# Altium PCB Face_Ant1V0.PcbDoc
Units mm, origin at the board's own origin, x right, y up, seen from the top; angles counter-clockwise.
Board outline 70 x 53 mm, 2 copper layers (Top Layer, Bottom Layer); 1 components, 1 nets, 4 pads, 2 vias.
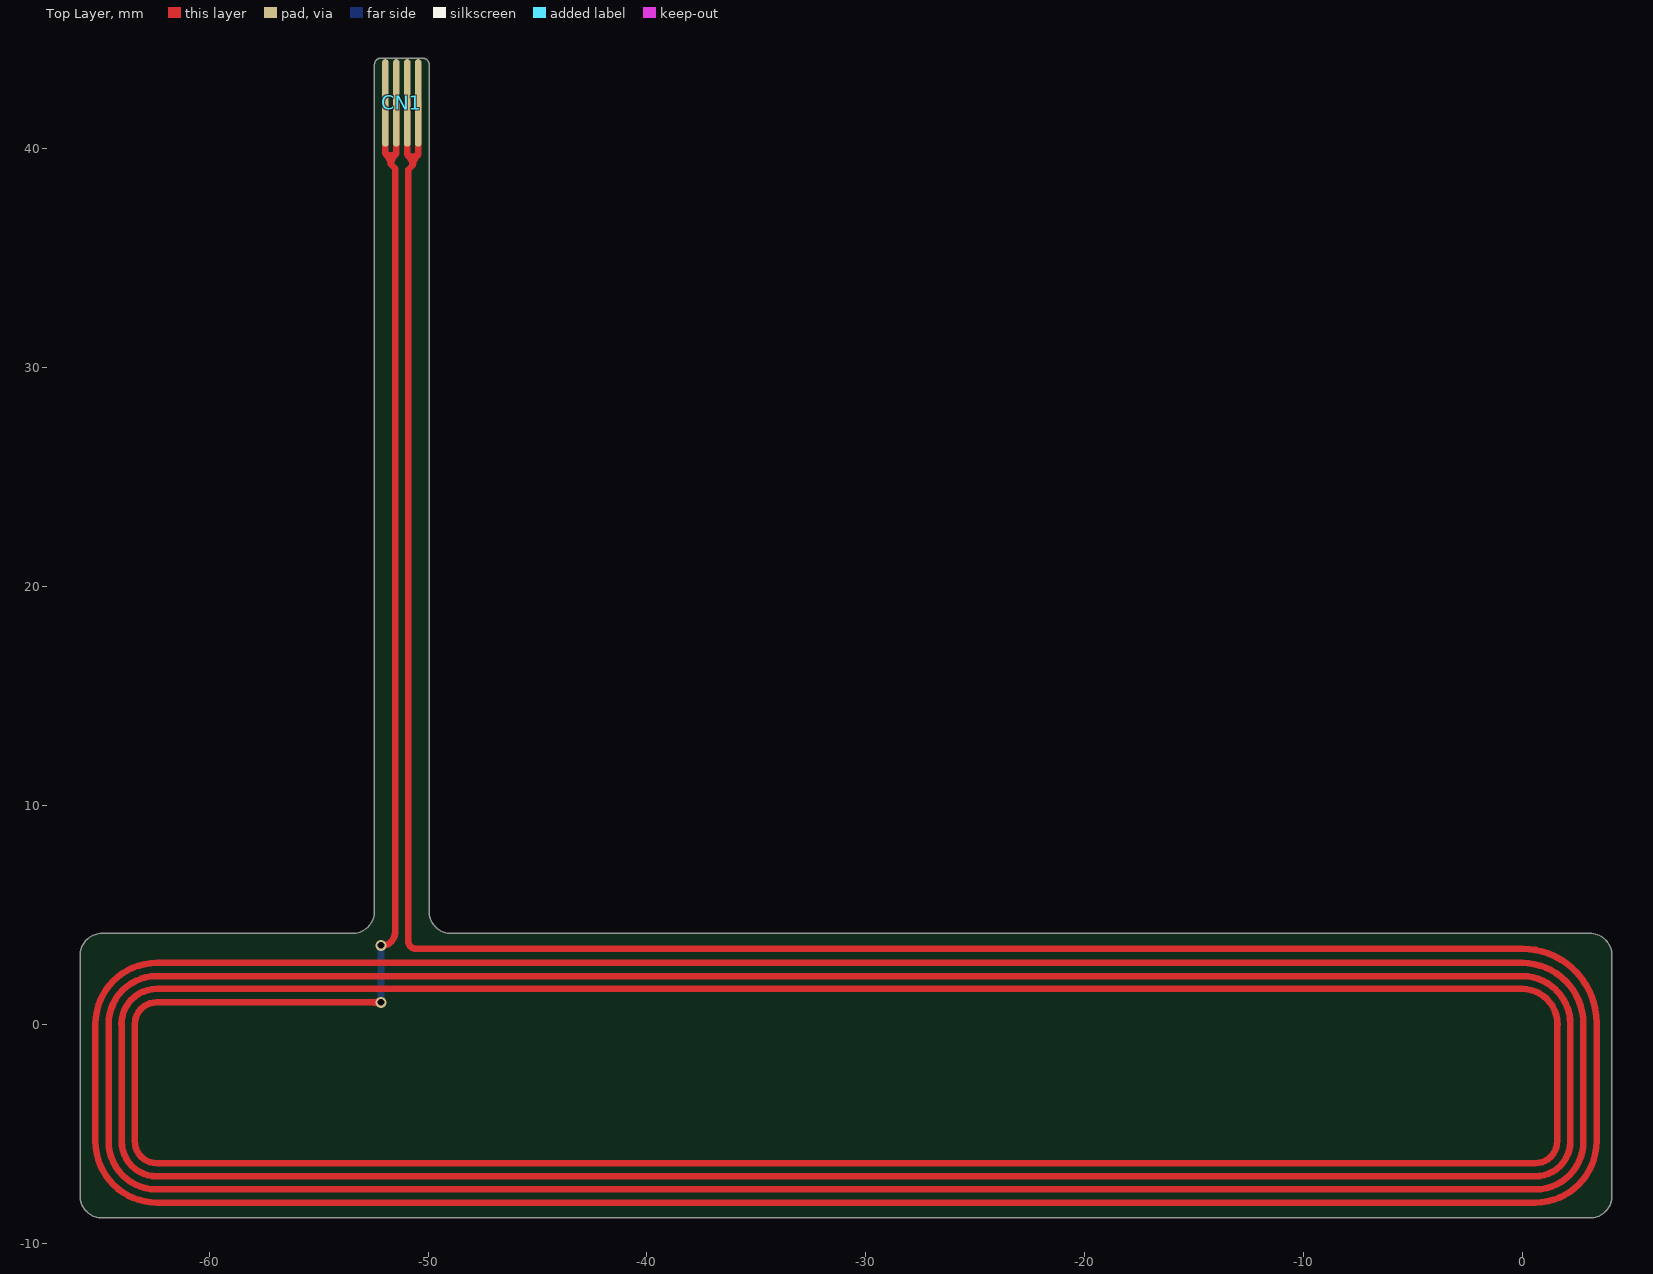
[diagram p0: Top Layer view]
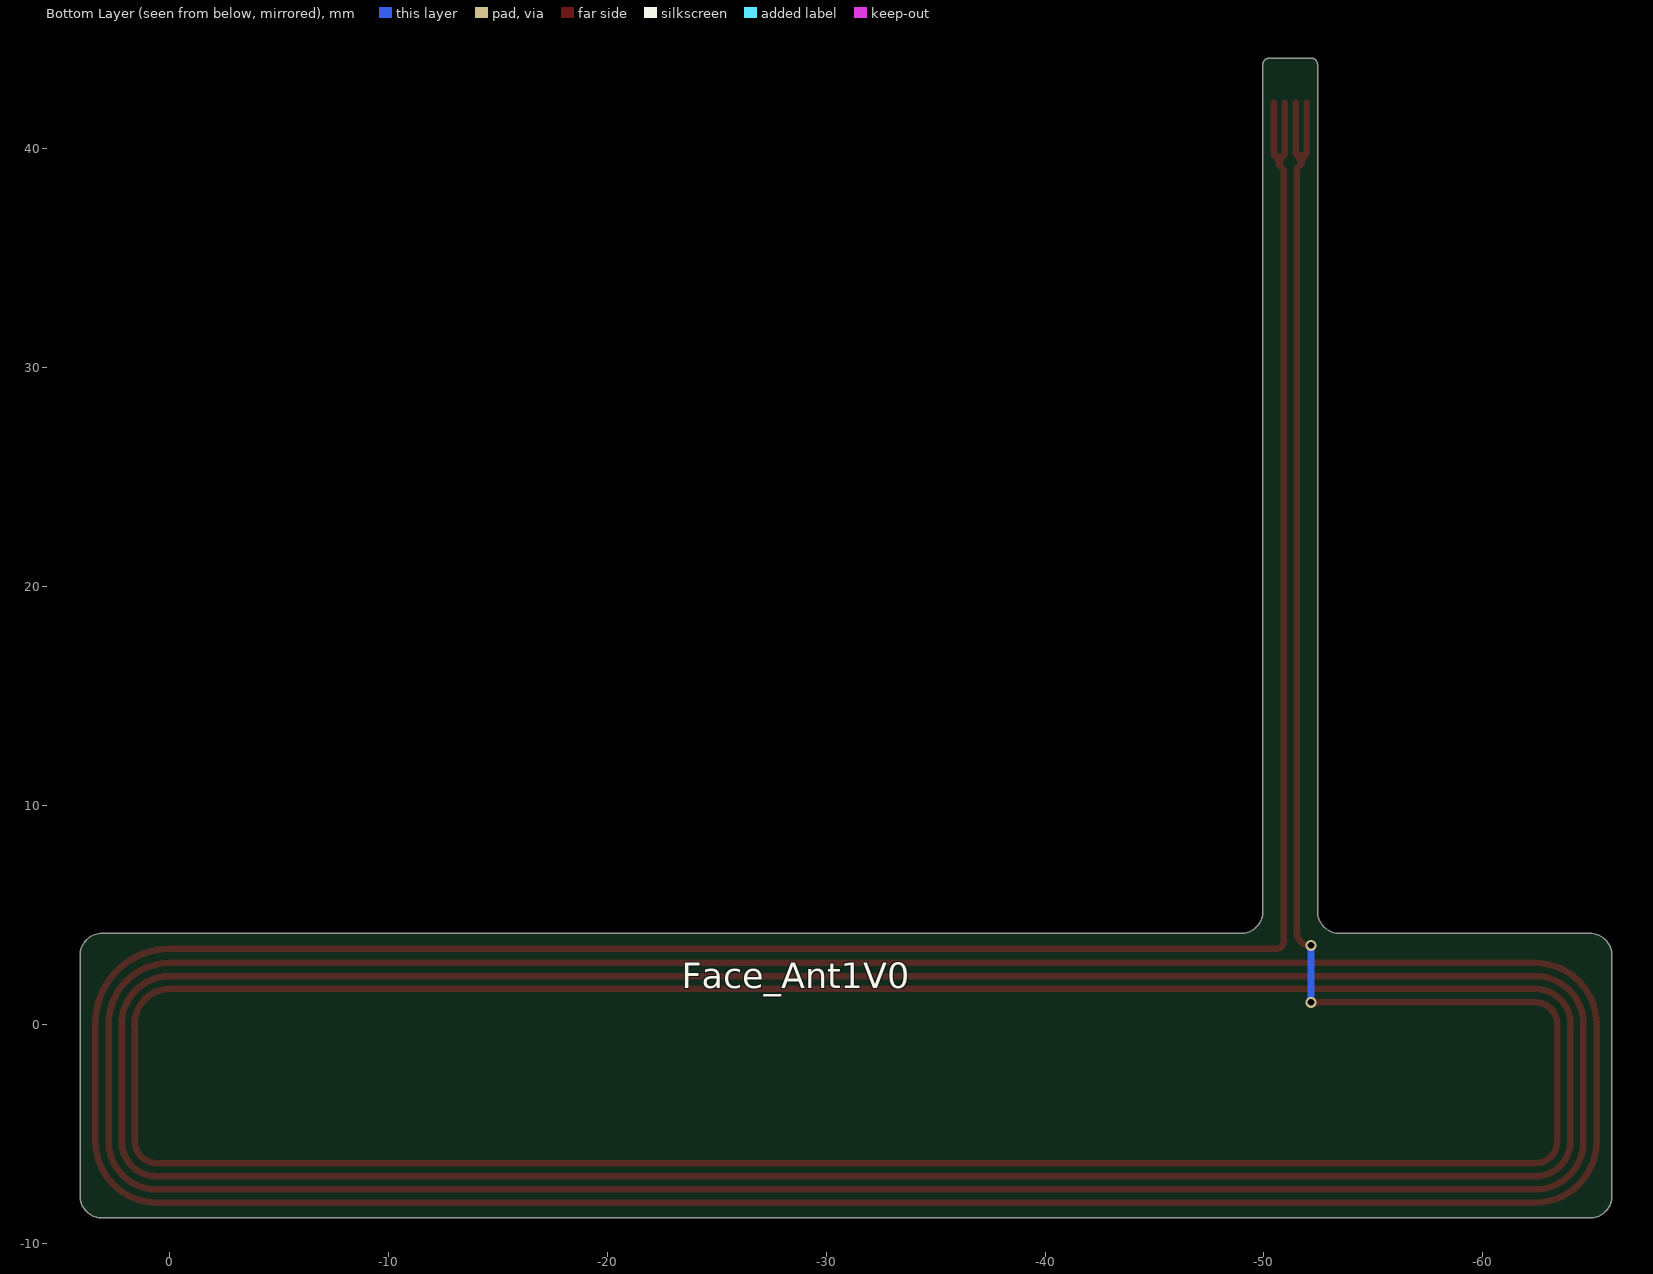
[diagram p1: Bottom Layer view, seen from below]

## Layer stack, top to bottom
Top Solder: solder mask 0.0102, Solder Resist, Dk 3.5
Top Layer: signal copper 0.0356
Dielectric 1: dielectric 0.32, FR-4, Dk 4.8
Bottom Layer: signal copper 0.0356
Bottom Solder: solder mask 0.0102, Solder Resist, Dk 3.5

## Board outline
-64.9,-8.85 cw(c-64.9,-7.85) -65.9,-7.85 -65.9,3.15 cw(c-64.9,3.15) -64.9,4.15 -53.45,4.15 ccw(c-53.45,5.15) -52.45,5.15 -52.45,43.85 cw(c-52.15,43.85) -52.15,44.15 -50.25,44.15 cw(c-50.25,43.85) -49.95,43.85 -49.95,5.15 ccw(c-48.95,5.15) -48.95,4.15 3.1,4.15 cw(c3.1,3.15) 4.1,3.15 4.1,-7.85 cw(c3.1,-7.85) 3.1,-8.85

## Design rules (kind name [scope] priority, off if disabled: settings)
Clearance [All] p1: gap=0.2 ignorepadtopadclearanceinfootprint=FALSE
HoleSize [All] p1: absolutevalues=TRUE maxlimit=6 minlimit=0.025 maxpercent=80.000 minpercent=20.000
MinimumSolderMaskSliver [All] p1: minsoldermaskwidth=0
PolygonConnect [All] p1: thpad.connectstyle=Relief thpad.reliefconductorwidth=0.254 thpad.reliefentries=4 thpad.polygonreliefangle="90 Angle" thpad.airgapwidth=0.254 smdpad.connectstyle=Relief smdpad.reliefconductorwidth=0.254 smdpad.reliefentries=4 smdpad.polygonreliefangle="90 Angle" smdpad.airgapwidth=0.254 via.connectstyle=Direct via.reliefconductorwidth=0.254 via.reliefentries=4 via.polygonreliefangle="90 Angle" via.airgapwidth=0.254
RoomDefinition Face_Ant1V0 [InComponentClass('Face_Ant1V0')] p1: confinementstyle=ConfineIn formatcopy=TRUE lockcomponents=FALSE outline -70.65,-12.9 10.75,-12.9 10.75,47.65 -70.65,47.65
RoutingVias [All] p1: holewidth=0.3 width=0.5 viastyle="Through Hole" minholewidth=0.3 minwidth=0.5 maxholewidth=1 maxwidth=2
SilkToSilkClearance [All] p1: silktosilkclearance=0
SilkToSolderMaskClearance [IsPad] p1: minsilkscreentomaskgap=0 clearancetoexposedcopper=TRUE
SolderMaskExpansion [All] p1: expansion=0.05 istentingtop=FALSE
UnRoutedNet [All] p1: checkbadconnections=TRUE
Width [All] p1: maxlimit=1 minlimit=0.2 preferedwidth=0.3
25 further rules are at their usual default settings.

## Components (designator, comment, footprint, x,y, rotation, side; value= is the part's Value field where it differs from the comment)
CN1 "NC/FPC4_0.5_4P" FFC0.5MM-4P -51.2,38.992 r180 top

## Footprints (in the part's own frame and the unit in brackets; to place one, negate y for a bottom-side part, rotate by r counter-clockwise, add the part's x,y. Pads: shape width x height; smd on the part's side, far side on the other; paste and mask are expansions set on the pad)
FFC0.5MM-4P [mm]
  oval 0.3x4 smd: 1(-0.75,-3.108) 2(-0.25,-3.108) 3(0.25,-3.108) 4(0.75,-3.108)

## Part data
CN1: library part "Header 1", "FPC4_0.5_4P", LatestRevisionDate=17-Jul-2002, LatestRevisionNote="Re-released for DXP Platform.", Publisher="Altium Limited"

## Via types
v1: diameter 0.5, hole 0.3, Top Layer to Bottom Layer, tented both sides, 2 vias

## Nets (pads, with @x,y where several pads share a name; then routed paths per layer and width w, separated by ;. In a path a pad name is that pad's centre, name@x,y a point inside that pad or via, vN(x,y) a via of type N, cw(c..) or ccw(c..) an arc to the next point about the centre after c; other vN are vias at no path point)
GND: CN1.1 CN1.2 CN1.3 CN1.4 | length 680.5
  Top Layer w0.3: -64.6,-5.353 ccw(c-62.4,-5.35) -62.4,-7.55 -30,-7.55 0.6,-7.55 ccw(c0.6,-5.35) 2.8,-5.35 2.8,0 ccw(c0,0) 0,2.8 -62.4,2.8 ccw(c-62.4,0) -65.2,0 -65.2,-5.35 ccw(c-62.4,-5.35) -62.401,-8.15 ; -64.6,-5.35 -64.6,0 cw(c-62.4,0) -62.403,2.2 0,2.2 cw(c0,0) 2.2,0.003 ; -64.012,0 cw(c-62.4,0) -62.403,1.612 ; -64,-5.353 ccw(c-62.4,-5.35) -62.4,-6.95 0.6,-6.95 ccw(c0.6,-5.35) 2.2,-5.35 2.2,0 ; -64,-5.35 -64,0 ; -62.403,1.612 0,1.612 cw(c0,0) 1.612,0.003 ; -62.4,-8.15 0.6,-8.15 ccw(c0.6,-5.35) 3.4,-5.35 3.4,0.05 ccw(c0,0.05) 0,3.45 -50.559,3.45 cw(c-50.559,3.791) -50.799,3.549 ; v1(-52.15,1) -62.4,1 ccw(c-62.4,0) -63.4,0 -63.4,-5.35 ccw(c-62.4,-5.35) -62.4,-6.35 0.6,-6.35 ccw(c0.6,-5.35) 1.6,-5.35 1.6,0 ; v1(-52.15,3.6) -52.062,3.6 ccw(c-52.062,4.112) -51.7,3.75 ccw(c-52.183,4.233) -51.5,4.233 -51.5,39.1 -51.7,39.3 -51.7,39.55 ; CN1.4 -51.95,39.8 -51.7,39.55 ; CN1.3 -51.45,39.8 -51.7,39.55 ; CN1.2 -50.95,39.75 -50.7,39.5 ; -50.799,3.549 cw(c-50.559,3.791) -50.9,3.791 -50.9,4.5 -50.9,39.05 -50.7,39.25 -50.7,39.5 ; CN1.1 -50.45,39.75 -50.7,39.5
  Bottom Layer w0.3: v1(-52.15,1) v1(-52.15,3.6)

## Silkscreen, mask and mechanical layers (free items; w line width, h text height)
Bottom Overlay:
  text "Face_Ant1V0" at -23.4,1.25 h2
Mechanical 1:
  lines w0.2: -65.9,-7.85 ccw(c-64.9,-7.85) -64.9,-8.85 3.1,-8.85 ccw(c3.1,-7.85) 4.1,-7.85 4.1,3.15 ccw(c3.1,3.15) 3.1,4.15 -48.95,4.15 cw(c-48.95,5.15) -49.95,5.15 -49.95,43.85 ccw(c-50.25,43.85) -50.25,44.15 -52.15,44.15 ccw(c-52.15,43.85) -52.45,43.85 -52.45,5.15 cw(c-53.45,5.15) -53.45,4.15 -64.9,4.15 ccw(c-64.9,3.15) -65.9,3.15 -65.9,-7.85
  lines w0.3: -62.4,-4.35 ccw(c-61.4,-4.35) -61.4,-5.35 -0.4,-5.35 ccw(c-0.4,-4.35) 0.6,-4.35 0.6,-1 ccw(c-0.4,-1) -0.4,0 -61.4,0 ccw(c-61.4,-1) -62.4,-1 -62.4,-4.35